# Altium PCB Newer.PcbDoc
Units mil, origin at the board's own origin, x right, y up, seen from the top; angles counter-clockwise.
Board outline 3350 x 2250 mil, 2 copper layers (Top Layer, Bottom Layer); 53 components, 48 nets, 213 pads, 30 vias.
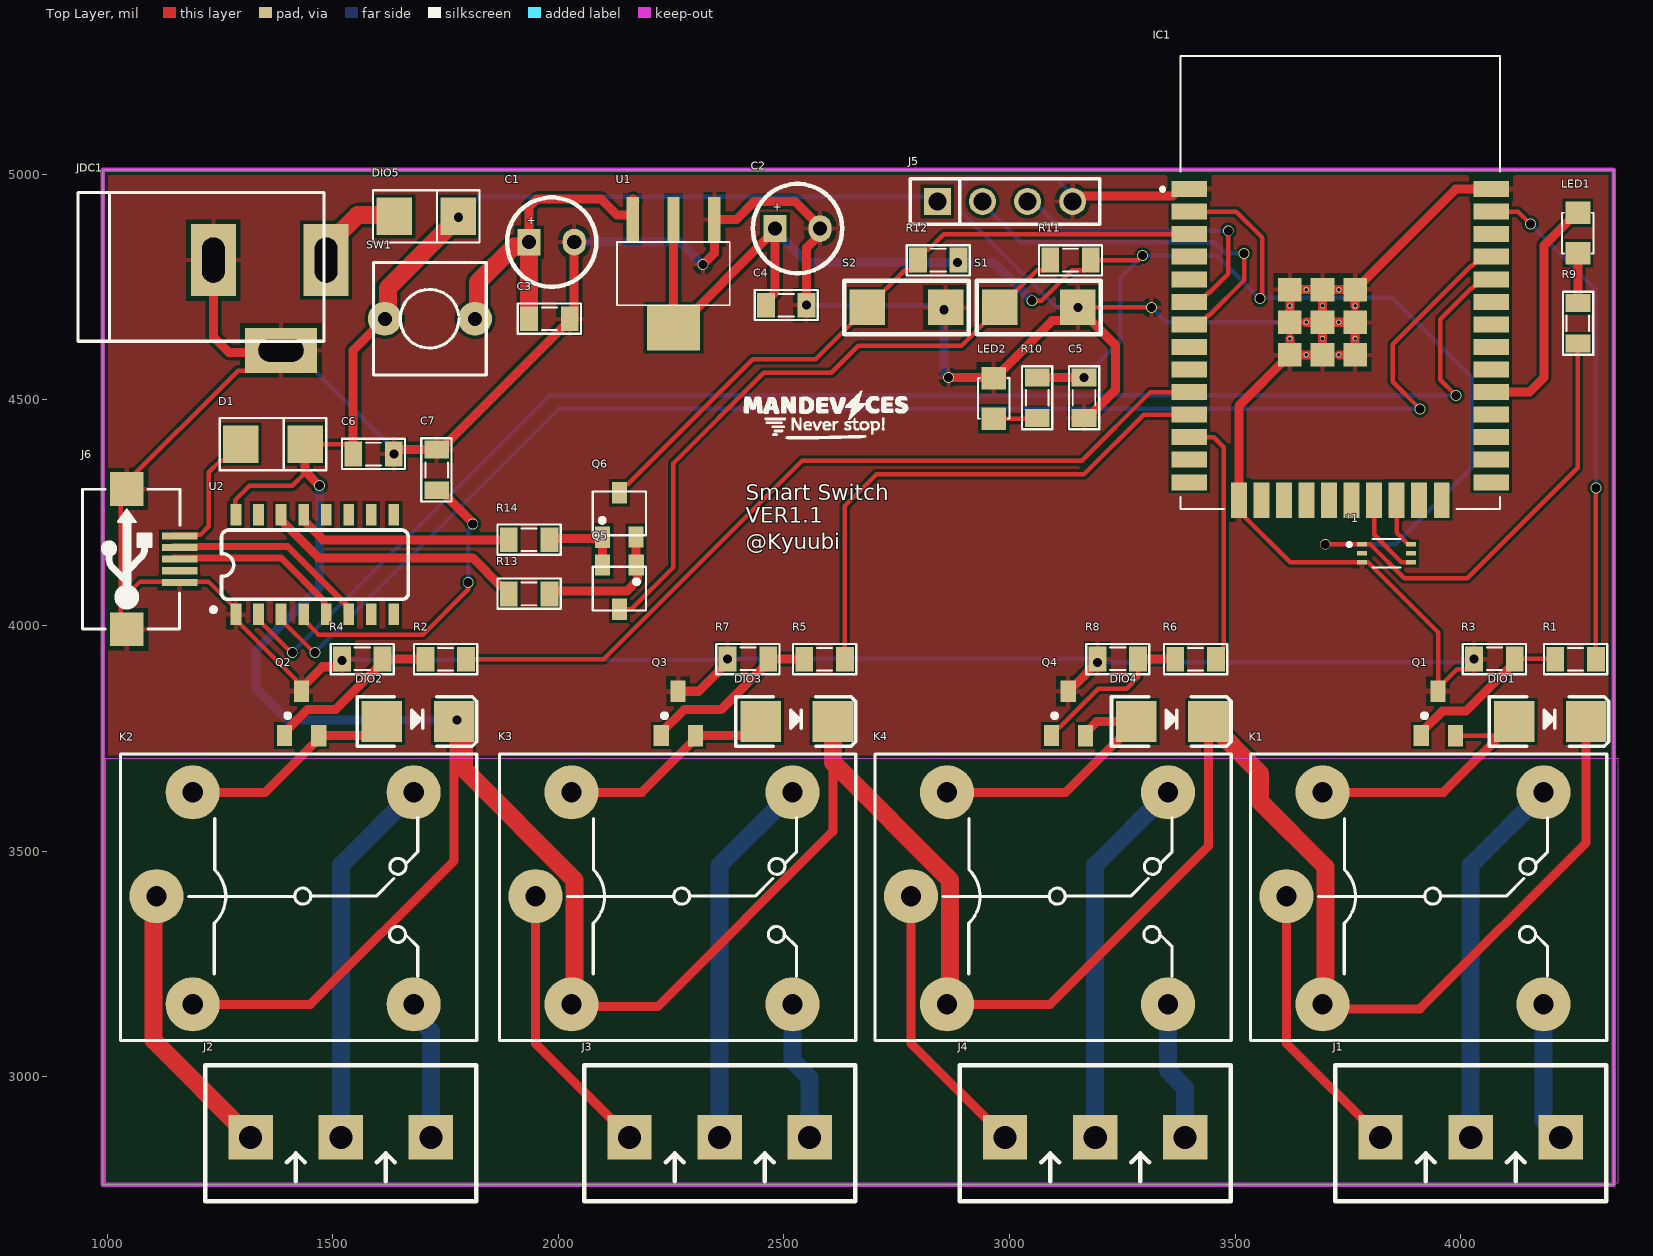
[diagram p0: Top Layer view]
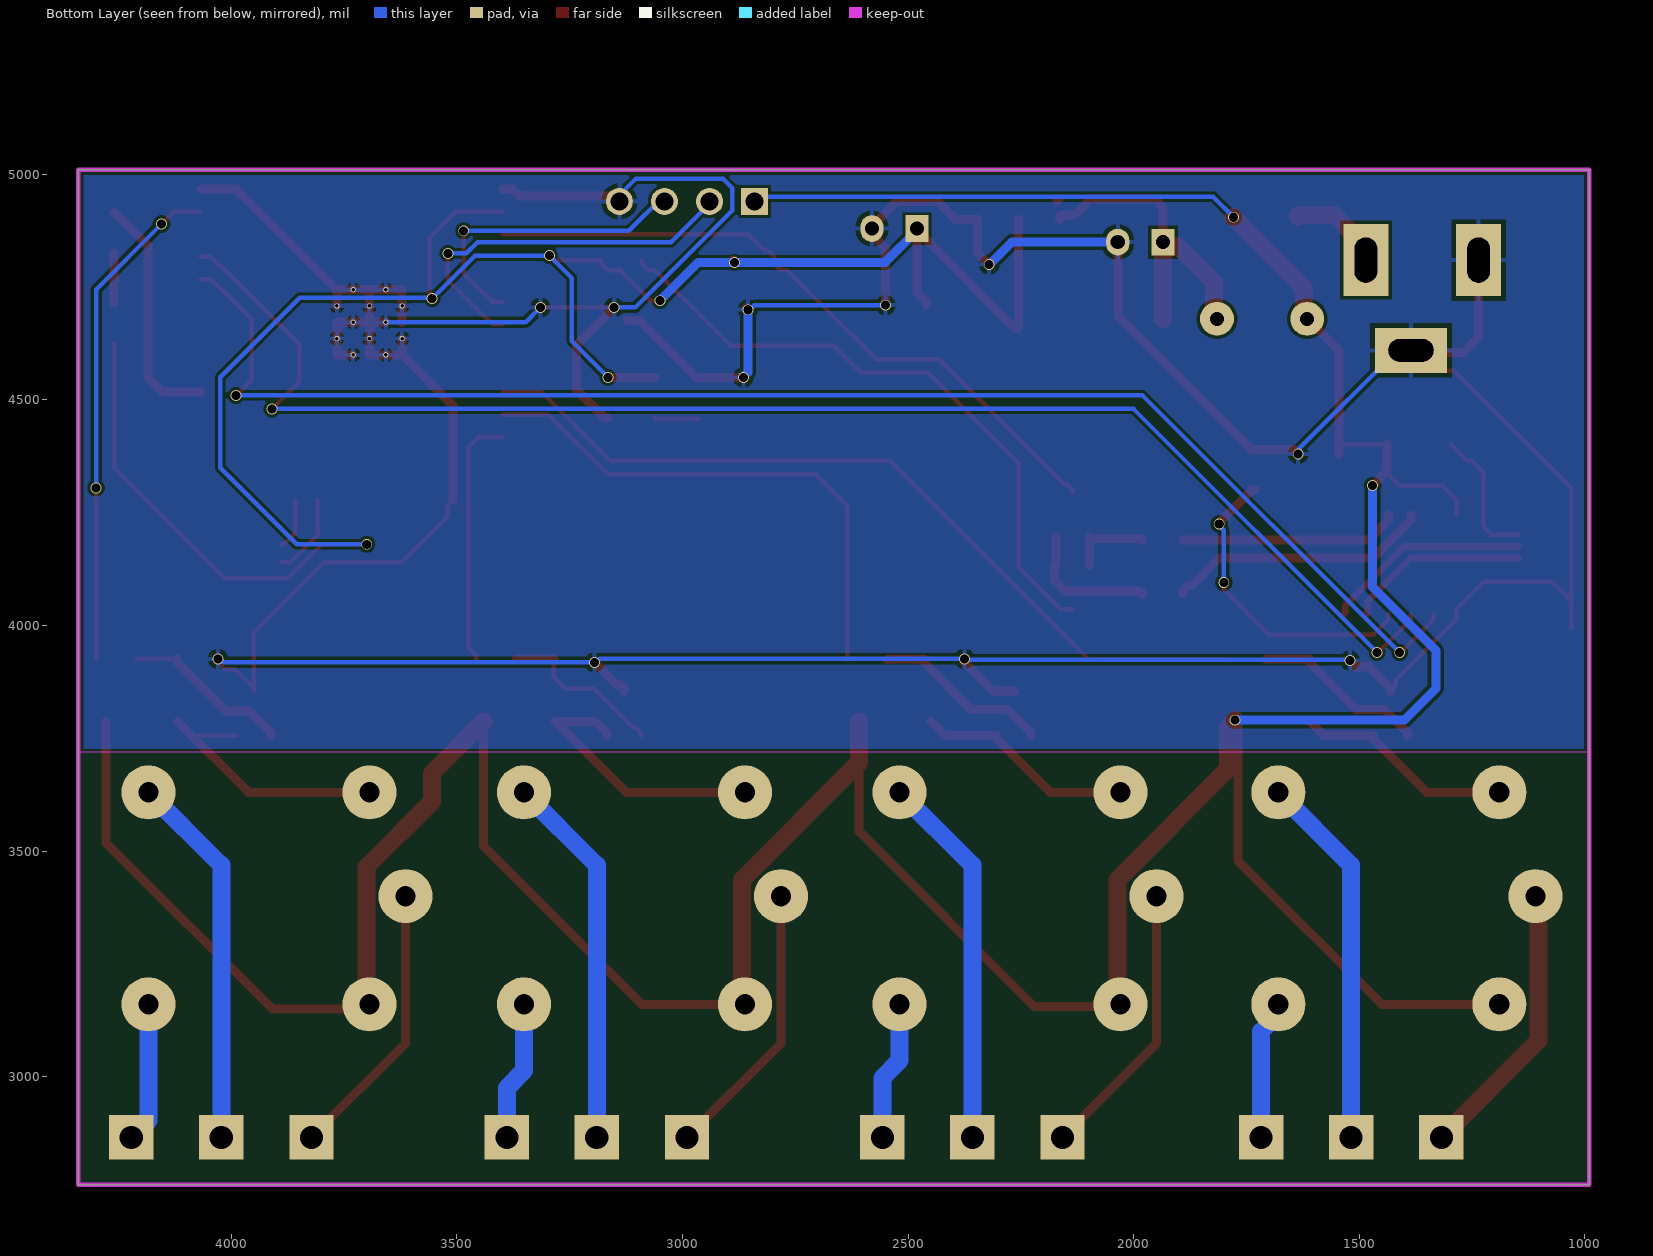
[diagram p1: Bottom Layer view, seen from below]
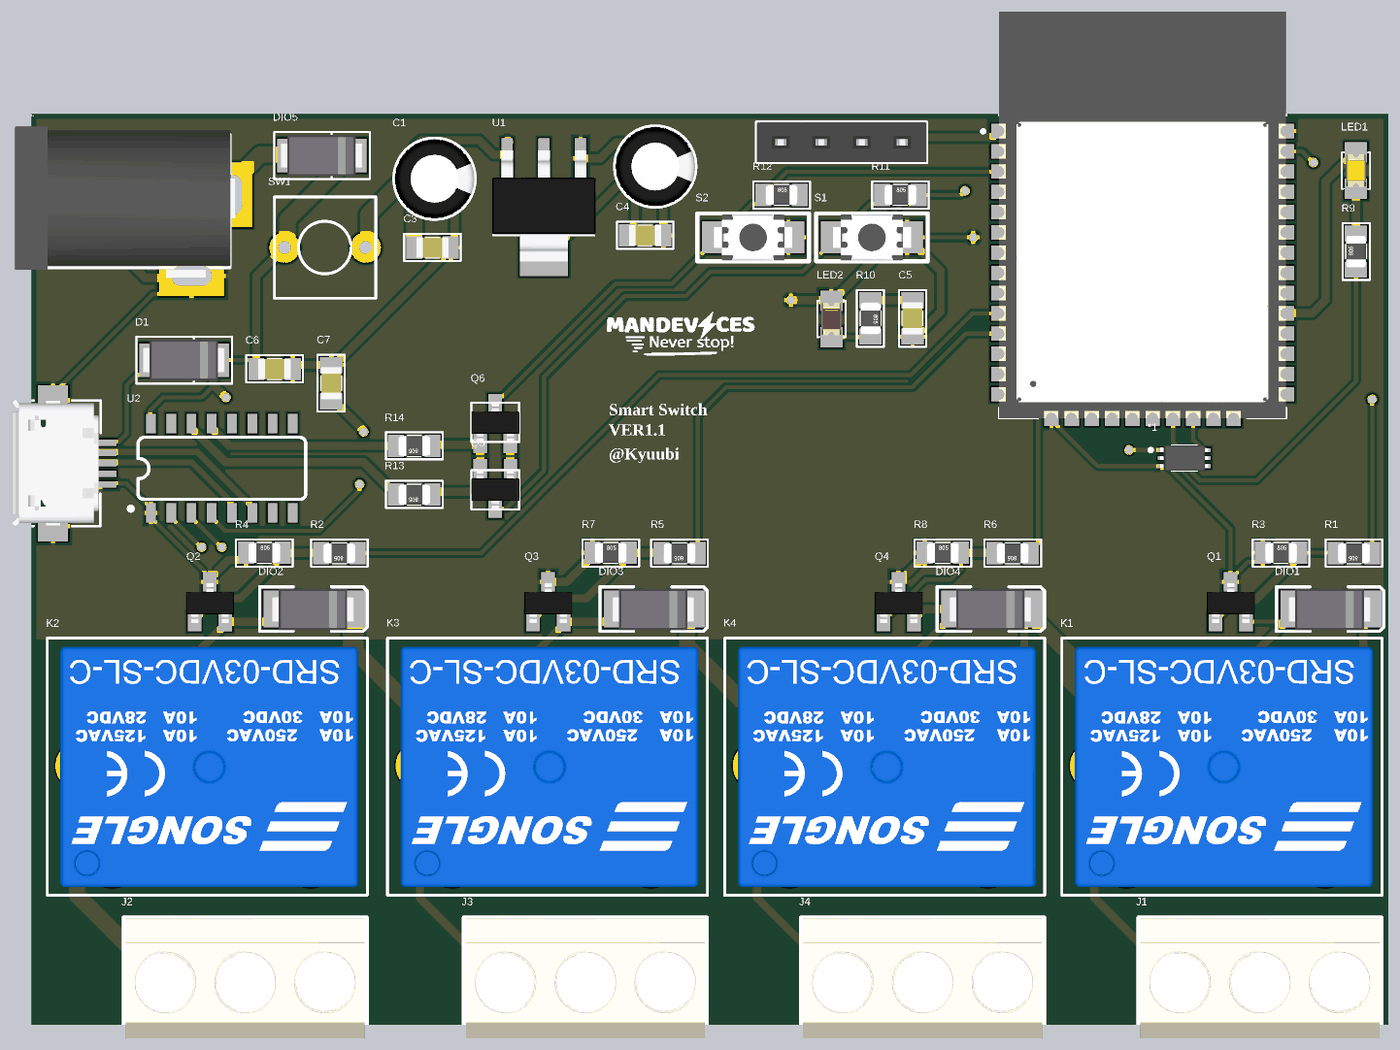
[diagram p2: 3D render of the assembled board from above, using the file's embedded part models]

## Layer stack, top to bottom
Top Solder: solder mask 0.4, Solder Resist, Dk 3.5
Top Layer: signal copper 1.4
Dielectric 1: dielectric 12.6, FR-4, Dk 4.8
Bottom Layer: signal copper 1.4
Bottom Solder: solder mask 0.4, Solder Resist, Dk 3.5

## Board outline
990,2760 990,5010 4340,5010 4340,2760

## Design rules (kind name [scope] priority, off if disabled: settings)
Clearance [All] p1: gap=7 ignorepadtopadclearanceinfootprint=TRUE
DiffPairsRouting [All] p1: maxlimit=10 minlimit=10 mostfreqgap=10 toplayer_minwidth=15 toplayer_maxwidth=15 toplayer_prefwidth=15 bottomlayer_minwidth=15 bottomlayer_maxwidth=15 bottomlayer_prefwidth=15 maxuncoupledlength=500
PolygonConnect [All] p1: connectstyle=Relief reliefconductorwidth=10 reliefentries=4 polygonreliefangle="90 Angle" airgapwidth=10
RoutingVias [All] p1: holewidth=20 width=24 viastyle="Through Hole" minholewidth=20 minwidth=24 maxholewidth=24 maxwidth=28
SolderMaskExpansion [All] p1: expansion=4 istentingtop=FALSE
Width [All] p1: maxlimit=40 minlimit=10 preferedwidth=20
29 further rules are at their usual default settings.

## Classes and differential pairs
component class U_MCU: *1 C1 C3 C4 C6 C7 D1 DIO5 IC1 IC2 J5 J6 JDC1 LED1 LED2 Q5 Q6 R9 R10 R11 R12 R13 R14 S1 S2 SW1 U1 U2
component class U_Control: DIO1 DIO2 DIO3 DIO4 J1 J2 J3 J4 K1 K2 K3 K4 Q1 Q2 Q3 Q4 R1 R2 R3 R4 R5 R6 R7 R8
differential pair D0: +D0_P -D0_N

## Components (designator, comment, footprint, x,y, rotation, side; value= is the part's Value field where it differs from the comment)
*1 "bh1750" BH1750 3865.62,4059 r90 top
C1 "220uF/10V" C5mm 1985,4850 r0 top
C2 "220uF/10V" C5mm 2530,4880 r0 top
C3 "220nF" CAP_0805 1980,4680 r180 top value=33p
C4 "100nF" CAP_0805 2505,4710 r180 top value=33p
C5 "10uF" CAP_0805 3165,4505 r90 top value=33p
C6 "10uF" CAP_0805 1590,4380 r180 top value=33p
C7 "100nF" CAP_0805 1730,4345 r270 top value=33p
D1 "Diode SMD" DIO-214AC(SMA) 1370,4400 r180 top value=1N5007
DIO1 "1N4148" DIO-SMD-106 4198.56,3787.1 r180 top value=1N5007
DIO2 "1N4148" DIO-SMD-106 1688.56,3787.1 r180 top value=1N5007
DIO3 "1N4148" DIO-SMD-106 2528.56,3787.1 r180 top value=1N5007
DIO4 "1N4148" DIO-SMD-106 3361.06,3787.1 r180 top value=1N5007
DIO5 "Diode SMD" DIO-214AC(SMA) 1710,4905 r180 top value=1N5007
IC1 "ESP32-WROOM-32" MODULE_ESP32-WROOM-32 3733.25,4760.43 r0 top
J1 "KF3" KF3-5.08 3822.5,2865 r0 top
J2 "KF3" KF3-5.08 1317.5,2865 r0 top
J3 "KF3" KF3-5.08 2157.5,2865 r0 top
J4 "KF3" KF3-5.08 2990,2865 r0 top
J5 "JP4" JP4-C1T 2840,4940 r0 top
J6 "USB-5" USB-M1 1160,4147 r90 top
JDC1 "Jac DC" DC-IN 1360,4710 r0 top
K1 "Relay-SPDT" RELAY5PIN-10A 3614,3400 r0 top
K2 "Relay-SPDT" RELAY5PIN-10A 1109,3400 r0 top
K3 "Relay-SPDT" RELAY5PIN-10A 1949,3400 r0 top
K4 "Relay-SPDT" RELAY5PIN-10A 2781.5,3400 r0 top
LED1 "LED" LED-0805-Orange 4260,4825 r90 top value="LED 3 ly Single Colour"
LED2 "LED" LED-0805-Red 2965,4458.5 r90 top value="LED 3 ly Single Colour"
Q1 "2SC1815" SOT23 3949.8,3805 r0 top value=C1815
Q2 "2SC1815" SOT23 1429.8,3805 r0 top value=C1815
Q3 "2SC1815" SOT23 2265,3805 r0 top value=C1815
Q4 "2SC1815" SOT23 3130,3805 r0 top value=C1815
Q5 "2SC1815" SOT23D 2135,4085 r180 top value=C1815
Q6 "2SC1815" SOT23D 2135,4245 r0 top value=C1815
R1 "330R" RES-SMD-0805 4255,3925 r180 top
R2 "330R" RES-SMD-0805 1750,3925 r180 top
R3 "100k" RES-SMD-0805 4075,3926 r0 top
R4 "100k" RES-SMD-0805 1565,3926 r0 top
R5 "330R" RES-SMD-0805 2590,3925 r180 top
R6 "330R" RES-SMD-0805 3412.5,3925 r180 top
R7 "100k" RES-SMD-0805 2420,3926 r0 top
R8 "100k" RES-SMD-0805 3240,3926 r0 top
R9 "10k" RES-SMD-0805 4260,4670 r90 top
R10 "1k" RES-SMD-0805 3061.5,4505 r270 top
R11 "10k" RES-SMD-0805 3135.3,4810 r0 top
R12 "10k" RES-SMD-0805 2841.91,4810 r0 top
R13 "10k" RES-SMD-0805 1935,4070 r180 top
R14 "10k" RES-SMD-0805 1935,4190 r180 top
S1 "SW-SMD" "SW 3x2x4" 3065,4705 r0 top
S2 "SW-SMD" "SW 3x2x4" 2771.61,4705 r0 top
SW1 "SW" SW2 1615,4680 r0 top value="SW chip 2 pin"
U1 "LM1117-ADJ" LM1117-SOP 2255,4850 r180 top
U2 "CH340C" SOP-16 1460,4135 r0 top

## Footprints (in the part's own frame and the unit in brackets; to place one, negate y for a bottom-side part, rotate by r counter-clockwise, add the part's x,y. Pads: shape width x height; smd on the part's side, far side on the other; paste and mask are expansions set on the pad)
BH1750 [mm]
  rect 0.25x0.55 smd: 1(3.065,2.131) 2(2.565,2.131) 3(2.065,2.131) 4(2.065,-0.619) 5(2.565,-0.619) 6(3.065,-0.619)
  silkscreen extent 1.77,-0.02 3.37,2.96, body extent 1.77,-0.74 3.37,2.26, height 0.75
C5mm [mm]
  rect 1.3x1.5 hole 0.8: 1(-1.27,0)
  oval 1.3x1.5 hole 0.8: 2(1.27,0)
  silkscreen extent -2.51,-2.51 2.51,2.51, body extent -2.5,-2.5 2.49,2.5, height 11.01
CAP_0805 [mil]
  rect 39.37x55 smd: 1(-45,0) 2(45,0)
  silkscreen extent -70,-34 70,33, body extent -40,-25 40,25, height 24
DC-IN [mil] "Jac DC input"
  rect 100x160 hole 50 slot 100 at 90 deg: 1(125,100) 2(-125,100)
  rect 160x100 hole 50 slot 100 at 0 deg: 3(25,-100)
  silkscreen extent -425,-80 120,250, body extent -410,-105 134,269, height 434
DIO-214AC(SMA) [mm] "DO-214AC Diode Smallest Size"
  rect 2x2.1 smd: 1(1.88,-0.051) 2(-1.732,-0.051)
  silkscreen extent -2.92,-1.52 3.07,1.42, body extent -2.5,-1.35 2.7,1.25, height 2.4
DIO-SMD-106 [mil]
  rect 90x90.55 smd: 1(80,0) 2(-80,0)
  silkscreen extent -130,-55 135,55, body extent -99,-50 106,52, height 95
JP4-C1T [mm] "4 row, straight, gold plating"
  rect 1.52x1.52 hole 1.02: 1(0,0)
  round 1.52 hole 1.02: 2(2.54,0) 3(5.08,0) 4(7.62,0)
  silkscreen extent -1.52,-1.27 9.14,1.27, body extent -1.52,-1.25 9.14,1.25, height 8.51
KF3-5.08 [mm]
  rect 2.5x2.5 hole 1.3: 1(0,0) 2(5.08,0) 3(10.147,0)
  silkscreen extent -2.54,-3.58 12.7,4.06, body extent -2.42,-3.51 12.58,3.99, height 10
LED-0805-Orange [mil]
  rect 50x55 smd: 1(0,0) 2(90,0)
  silkscreen extent 0,-35 90,35, body extent 5,-25 85,25, height 43
LED-0805-Red [mil]
  rect 50x55 smd: 1(0,0) 2(90,0)
  silkscreen extent 0,-35 90,35, body extent 5,-25 85,25, height 43
LM1117-SOP [mm]
  rect 0.7x2.54 smd: 1(-2.3,-1.27) 2(0,-1.27) 3(2.3,-1.27)
  rect 3x2.54 smd: 2(0,4.826)
  silkscreen extent -3.18,0 3.17,3.56, body extent -3.25,-1.78 3.25,5.18, height 1.68
MODULE_ESP32-WROOM-32 [mm]
  rect 2x0.9 smd: 1(-8.5,5.26) 2(-8.5,3.99) 3(-8.5,2.72) 4(-8.5,1.45) 5(-8.5,0.18) 6(-8.5,-1.09) 7(-8.5,-2.36) 8(-8.5,-3.63) 9(-8.5,-4.9) 10(-8.5,-6.17) 11(-8.5,-7.44) 12(-8.5,-8.71) 13(-8.5,-9.98) 14(-8.5,-11.25) 25(8.5,-11.25) 26(8.5,-9.98) 27(8.5,-8.71) 28(8.5,-7.44) 29(8.5,-6.17) 30(8.5,-4.9) 31(8.5,-3.63) 32(8.5,-2.36) 33(8.5,-1.09) 34(8.5,0.18) 35(8.5,1.45) 36(8.5,2.72) 37(8.5,3.99) 38(8.5,5.26)
  rect 0.9x2 smd: 15(-5.715,-12.25) 16(-4.445,-12.25) 17(-3.175,-12.25) 18(-1.905,-12.25) 19(-0.635,-12.25) 20(0.635,-12.25) 21(1.905,-12.25) 22(3.175,-12.25) 23(4.445,-12.25) 24(5.715,-12.25)
  rect 1.33x1.33 smd: 39_1(-2.835,-0.405) 39_2(-1,-0.405) 39_3(0.835,-0.405) 39_4(-2.835,-2.24) 39_5(-1,-2.24) 39_6(0.835,-2.24) 39_7(-2.835,-4.075) 39_8(-1,-4.075) 39_9(0.835,-4.075)
  round 0.3 hole 0.2: 39_10(-1.917,-0.405) 39_11(-0.082,-0.405) 39_12(-2.835,-1.322) 39_13(-1,-1.322) 39_14(0.835,-1.322) 39_15(-1.917,-2.24) 39_16(-0.082,-2.24) 39_17(-2.835,-3.157) 39_18(-1,-3.157) 39_19(0.835,-3.157) 39_20(-1.917,-4.075) 39_21(-0.082,-4.075)
  silkscreen extent -10.1,-12.75 9,12.75, body extent -9.02,-12.75 8.98,12.75, height 3.2
RELAY5PIN-10A [mil]
  round 120 hole 45: 1(0,0) 2(570,230) 3(570,-240) 4(80,-240) 5(80,230)
  silkscreen extent -80,-320 710,315, body extent -48,-300 688,294, height 102
RES-SMD-0805 [mil]
  rect 39.37x55 smd: 1(-45,0) 2(45,0)
  silkscreen extent -70,-34 70,33, body extent -39,-25 39,25, height 31
SOP-16 [mm]
  rect 0.6x1.2 smd: 1(-4.445,-2.8) 2(-3.175,-2.8) 3(-1.905,-2.8) 4(-0.635,-2.8) 5(0.635,-2.8) 6(1.905,-2.8) 7(3.175,-2.8) 8(4.445,-2.8) 9(4.445,2.8) 10(3.175,2.8) 11(1.905,2.8) 12(0.635,2.8) 13(-0.635,2.8) 14(-1.905,2.8) 15(-3.175,2.8) 16(-4.445,2.8)
  silkscreen extent -5.84,-2.67 5.26,1.95, body extent -4.95,-3.47 4.95,3.47, height 1.75
SOT23 [mm] "SOT 23 _ 1-3-2"
  rect 0.85x1.2 smd: 1(-0.94,-1.245) 2(0.985,-1.25) 3(0.005,1.25)
  silkscreen extent -0.88,-0.25 -0.64,0, body extent -1.47,-1.33 1.53,1.17, height 1.06
SOT23D [mm] "SOT 23C - 1-3-2 - BCE"
  rect 0.85x1.2 smd: 1(-0.95,-1.25) 2(0.94,-1.245) 3(0,1.25)
  silkscreen extent -1.5,-1.14 1.5,1.32, body extent -1.5,-1.17 1.5,1.33, height 1.06
SW2 [mil] "SW button 2pin, 250x 250 mil"
  round 75 hole 31: 1(0,0) 2(200,0)
  silkscreen extent -25,-125 225,125
"SW 3x2x4" [mm]
  rect 2x2 smd: 1(-2.2,0) 2(2.2,0)
  silkscreen extent -3.5,-1.5 3.5,1.5, body extent -2.45,-1.45 2.45,1.45, height 2
USB-M1 [mm]
  rect 0.4x2 smd: 1(1.3,0) 2(0.65,0) 3(0,0) 4(-0.65,0) 5(-1.321,0)
  rect 1.9x1.9 smd: 5(-3.95,2.968) 5(3.95,2.968)
  silkscreen extent -3.94,-0.03 3.94,5.46, body extent -3.98,0.11 4,5.54, height 2.71

## Part data
C1 C2: library part "Cap Pol", "Polarized Capacitor (Axial)", LatestRevisionDate=17-Jul-2002, LatestRevisionNote="Re-released for DXP Platform.", PackageReference=POLAR0.8, Published=8-Jun-2000, Publisher="Altium Limited"
C3 C4 C5 C6 C7: library part CapSMD, "Capacitor", LatestRevisionDate=17-Jul-2002, LatestRevisionNote="Re-released for DXP Platform.", PackageReference=RAD-0.3, Published=8-Jun-2000, Publisher="Altium Limited"
D1 DIO5: "Default Diode", Code - JEDEC=DO-214-AB, Published=8-Jun-2000, Publisher="Altium Limited", Revision="July-2002: Re-released for DXP Platform."
DIO1 DIO2 DIO3 DIO4: library part "Diode SMD", "Default Diode", Code - JEDEC=DO-214-AB, Published=8-Jun-2000, Publisher="Altium Limited", Revision="July-2002: Re-released for DXP Platform."
IC1: "Bluetooth, WiFi Transceiver Module 2.4GHz ~ 2.5GHz Surface Mount", Package="Module Espressif Systems", Digi-Key_Part_Number=1904-1010-1-ND, Digi-Key_Purchase_URL=https://www.digikey.com/product-detail/en/espressif-systems/ESP32-WROOM-32/1904-1010-1-ND/8544305?utm_source=snapeda&utm_medium=aggregator&utm_campaign=symbol, MF="Espressif Systems", MP=ESP32-WROOM-32, SnapEDA_Link=https://www.snapeda.com/parts/ESP32-WROOM-32/Espressif%20Systems/view-part/2753322/?ref=snap
J1 J2 J3 J4: Manufacturer="Würth Elektronik eiSos GmbH", partNo=691103110003, ComponentLink1 Description=Manufacturer, ComponentLink1URL=http://www.we-online.com, ComponentLink2 Description=Datasheet, ComponentLink2URL=http://katalog.we-online.de/em/datasheet/6911031100xx.pdf, Created by="Karrer Zheng", Created Date="29 October 2013", NoPins=3
J5: "WR-PHD 2.54 mm Angled Socket Header", Manufacturer="W¨¹rth Elektronik eiSos GmbH", partNo=613004143121, ComponentLink1 Description=Manufacturer, ComponentLink1URL=http://www.we-online.com, ComponentLink2 Description=Datasheet, ComponentLink2URL=http://katalog.we-online.de/em/datasheet/6130xx143121.pdf, Created by="Karrer Zheng", Created Date="29 March 2013", NoPins=04
J6: Manufacturer=FCI, Manufacturer Part Number=10118193-0001LF, Supplier Part Number 1=609-4616-1-ND, .Checked PCB=RF, .Checked SCH=MM, .Creator=MM, Category="Connectors, Interconnects", ComponentLink1Description=http://portal.fciconnect.com/Comergent//fci/drawing/10118193.pdf, ComponentLink1URL=http://portal.fciconnect.com/Comergent//fci/drawing/10118193.pdf, Connector Type="USB - micro B", Features="Shielded, Solder Retention", Gender=Receptacle, Ingress Protection=-, Mounting Type="Surface Mount, Right Angle, Horizontal", Number of Contacts=5, Packaging="Cut Tape (CT)", Pricing 1="1=0.46, 10=0.433, 25=0.3712, 50=0.3156, 100=0.3032, 250=0.27224, 500=0.25988 (USD)", RoHS="RoHS Compliant", Specifications="USB 2.0", Stock 1=28642, Supplier 1=Digi-Key
JDC1: library part DCIN, "Jac DC input"
K1 K2 K3 K4: "Single-Pole Dual-Throw Relay", LatestRevisionDate=17-Jul-2002, LatestRevisionNote="Re-released for DXP Platform.", PackageReference=MODULE5B, Published=24-Mar-1999, Publisher="Altium Limited"
LED1 LED2: "LED Single colour Green and Red"
Q1 Q2 Q3 Q4: "NPN 600mW, ECB"
Q5 Q6: library part C1815, "NPN 600mW, ECB"
R1 R2 R3 R4 R5 R6 R7 R8: library part "Resistor - SMD", "Resistor", Manufacturer="Generic Components", Class=Passive, Published=08/06/2000, Publisher="Altium Hobart Technology Centre"
R9 R10 R11 R12 R13 R14: library part "Resistor - SMD", "Resistor SMD", Manufacturer="Generic Components", Class=Passive, Published=08/06/2000, Publisher="Altium Hobart Technology Centre"
S1 S2: "Switch", LatestRevisionDate=17-Jul-2002, LatestRevisionNote="Re-released for DXP Platform.", PackageReference=SPST-2, Published=24-Mar-1999, Publisher="Altium Limited"
SW1: library part SW2, "Switch button 2 pin"
U1: "800mA Low-Dropout Linear Regulator", Creator="Nguyen Ba Bien", Website=http://group3i.net
U2: "USB to serial chip CH340", Package=Package, Availability=Unavailable, Check_prices=https://www.snapeda.com/parts/CH340C/WCH/view-part/5428851/?ref=eda, MF=WCH, MP=CH340C, Price=None, SnapEDA_Link=https://www.snapeda.com/parts/CH340C/WCH/view-part/5428851/?ref=snap

## Via types
v1: diameter 24, hole 20, Top Layer to Bottom Layer, 30 vias

## Nets (pads, with @x,y where several pads share a name; then routed paths per layer and width w, separated by ;. In a path a pad name is that pad's centre, name@x,y a point inside that pad or via, vN(x,y) a via of type N, cw(c..) or ccw(c..) an arc to the next point about the centre after c; other vN are vias at no path point)
3V3: *1.1 C2.1 C4.2 C5.2 IC1.2 R9.1 R10.1 R11.2 R12.2 U1.2 | length 4827.7
  Top Layer w10: v1(3050,4720) 3070.9,4720 3138.4,4787.5 3165.61,4787.5 3180.29,4802.19 R11.2 3285,4810 v1(3295,4820) ; IC1.2 3502.48,4917.52 3560,4860 3560,4730 v1(3555,4725) ; v1(3700,4180) 3700.24,4179.76 3781.65,4179.76 *1.1 3800.32,4179.69 3875,4105 4015,4105 4260,4350 R9.1
  Top Layer w20: U1.2@2255,4900 2255,4660 2264.06,4660 2464.41,4860.35 2464.41,4864.41 C2.1 2480,4737.81 2460,4717.81 C4.2 ; v1(2885,4805) 2886.91,4806.91 R12.2 ; R10.1 v1(3165,4550)
  Bottom Layer w10: v1(3165,4550) 3245,4630 3245,4770 v1(3295,4820) 3460,4820 v1(3555,4725) 3556.27,4726.27 3848.73,4726.27 4025,4550 4025,4350 3855,4180 v1(3700,4180)
  Bottom Layer w20: C2.1 2480,4876.06 2551.06,4805 v1(2885,4805) 2965,4805 v1(3050,4720)
5V: C6.2 D1.2 DIO1.2 DIO2.2 DIO3.2 DIO4.2 DIO5.2 J5.1 K1.4 K2.4 K3.4 K4.4 SW1.1 U2.16 | length 9265.5
  Top Layer w10: U2.16 1283,4247.24 1283,4278 1315,4310 1410,4310 1438.2,4338.2 1438.2,4341.8 ; D1.2 1530.32,4402 C6.2@1545,4387.31
  Top Layer w20: K2.4 1450,3160 1768.56,3478.56 DIO2.2 ; D1.2 1438.2,4341.8 v1(1470,4310) ; C6.2 1545,4387.31 1545,4610 SW1.1 ; K3.4 2034,3155 2220,3155 2608.56,3543.56 2608.56,3695.97 ; K4.4 3090,3160 3441.06,3511.06 DIO4.2@3441.06,3786.83 ; K1.4 3704,3150 3910,3150 4278.56,3518.56 DIO1.2
  Top Layer w40: SW1.1 1621.7,4686.7 1621.7,4748.52 v1(1778.2,4905.03) ; v1(1775,3790) 1790.21,3774.79 1790.21,3681.83 2036,3436.04 2036,3167 K3.4 ; DIO3.2 2608.56,3695.97 2868.5,3436.04 2868.5,3167 K4.4 ; DIO4.2 3441.06,3786.83 3555.53,3672.36 3555.53,3609.47 3701,3464 3701,3167 K1.4
  Bottom Layer w10: v1(1778.2,4905.03) 1823.17,4950 J5.1@2844.01,4950
  Bottom Layer w20: v1(1470,4310) 1470,4085 1330,3945 1330,3860 1400,3790 v1(1775,3790)
C0: J1.1 K1.1 | length 621.4
  Top Layer w20: K1.1 3614,3073.5 J1.1
C1: J2.1 K2.1 | length 627.2
  Top Layer w40: K2.1 1102,3393 1102,3080.5 J2.1
C2: J3.1 K3.1 | length 621.4
  Top Layer w20: K3.1 1949,3073.5 J3.1
C3: J4.1 K4.1 | length 621.4
  Top Layer w20: K4.1 2781.5,3073.5 J4.1
D0_N: J6.2 U2.6 | length 459.3
  Top Layer w15: J6.2@1146.84,4175.08 1399.92,4175.08 1530.69,4044.31 1530.69,4029.07 U2.6
D0_P: J6.3 U2.5 | length 404.6
  Top Layer w15: J6.3@1146.84,4149.49 1385.51,4149.49 1480.69,4054.31 1480.69,4029.07 U2.5
GND: *1.3 C1.2 C2.2 C3.1 C4.1 C5.1 C6.1 C7.1 IC1.1 IC1.15 IC1.38 IC1.39_1 IC1.39_2 IC1.39_3 IC1.39_4 IC1.39_5 IC1.39_6 IC1.39_7 IC1.39_8 IC1.39_9 IC1.39_10 IC1.39_11 IC1.39_12 IC1.39_13 IC1.39_14 IC1.39_15 IC1.39_16 IC1.39_17 IC1.39_18 IC1.39_19 IC1.39_20 IC1.39_21 J5.4 J6.5 JDC1.2 JDC1.3 LED2.2 Q1.3 Q2.3 Q3.3 Q4.3 R3.1 R4.1 R7.1 R8.1 S1.2 S2.2 U1.1 U2.1 | length 11278.3
  Top Layer w10: J6.5@1030,3993.98 1030,4055 ; JDC1.3 1380,4605 1340,4565 1290,4565 1030,4305 1030,4055 ; Q2.3 1418.27,3865.95 1418.27,3879.68 1285,4012.95 U2.1 1285,4036.57 1224.09,4097.49 1146.84,4097.49 1072.49,4097.49 1030,4055 ; v1(1520,3922.09) R4.1 ; v1(3151.61,4705) v1(3315,4705) ; IC1.15 3520.96,4265.43 3520.96,4241.38 3622.03,4140.31 3794.68,4140.31 3950,3985 Q1.3@3950,3861.1 ; Q1.3 Q1.3@3950,3861.1 ; R3.1@4030,3918.19 4015.31,3903.5 3992.4,3903.5 Q1.3@3950,3861.1
  Top Layer w20: JDC1.2 1235,4640 1270,4605 JDC1.3@1380,4605 ; Q2.3 1430,3861.1 1477.4,3908.5 R4.1@1510.31,3908.5 ; C6.1@1644.69,4390 C7.1 1737.81,4390 2035,4687.19 C1.2 ; Q3.3 2311.03,3854.21 R7.1@2375,3918.19 ; v1(2320,4800) 2345.55,4825.55 U1.1 2394.67,4900 2434.67,4940 2523.94,4940 2580,4883.94 C2.2 2580,4867.63 2550,4837.63 v1(2550,4710) ; v1(2855,4700) 2855,4701.77 S2.2 ; v1(2865,4550) 2963.5,4550 LED2.2 2967.5,4548.5 3094.63,4675.63 S1.2@3122.24,4675.63 ; Q4.3 3130.2,3861.1 3136.93,3867.84 3144.65,3867.84 v1(3195,3918.19) ; J5.4@3144.01,4950 3146.24,4952.24 3361.67,4952.24 3376.95,4967.52 IC1.1 ; v1(3151.61,4705) 3235,4621.61 3235,4522.18 3172.81,4460 C5.1 ; IC1.15 3508.25,4486.61 IC1.39_7 ; IC1.39_17 IC1.39_7 ; IC1.39_4 IC1.39_12 IC1.39_1 IC1.39_10 IC1.39_2 ; IC1.39_15 IC1.39_5 ; IC1.39_21 IC1.39_9 IC1.39_19 IC1.39_6 IC1.39_16 IC1.39_5 ; IC1.39_14 IC1.39_3 ; IC1.38 3989.15,4967.52 IC1.39_3 ; IC1.39_7 IC1.39_20 IC1.39_8 IC1.39_18 IC1.39_5 ; IC1.39_5 IC1.39_13 IC1.39_2 ; IC1.39_2 IC1.39_11 IC1.39_3
  Bottom Layer w10: JDC1.3 1415,4610 1632.32,4392.68 1632.32,4382.68 v1(1635,4380) ; v1(1520,3922.09) 1521.95,3924.05 2373.04,3924.05 v1(2375,3926) 3183.4,3926 3191.21,3918.19 v1(3195,3918.19) 4018.39,3918.19 4026.21,3926 v1(4030,3926) ; v1(2550,4710) 2841.21,4710 2851.21,4700 v1(2855,4700) ; J5.4@3144.01,4950 3104.01,4990 2910,4990 2890,4970 2890,4920 3105,4705 v1(3151.61,4705) ; v1(3315,4705) 3347.76,4672.24 IC1.39_15
  Bottom Layer w20: C1.2 2270,4850 v1(2320,4800) ; v1(2855,4700) 2855,4561.08 2865,4551.08 v1(2865,4550)
GPIO0: Q5.3 R11.1 S1.1 | length 1415.9
  Top Layer w10: Q5.3 2161.75,4035.79 2255,4129.04 2255,4360 2455,4560 2605,4560 2665,4620 2893.39,4620 S1.1 3060.89,4787.5 3075.61,4787.5 3090.29,4802.19 R11.1
IO5: IC1.29 LED1.2 | length 528.1
  Top Layer w20: IC1.29 4152.52,4517.52 4185,4550 4185,4842.5 4257.5,4915 LED1.2
NC0: J1.2 K1.2 | length 831.9
  Bottom Layer w40: J1.2 4022.5,3468.5 K1.2
NC1: J2.2 K2.2 | length 831.9
  Bottom Layer w40: J2.2 1517.5,3468.5 K2.2
NC2: J3.2 K3.2 | length 831.9
  Bottom Layer w40: J3.2 2357.5,3468.5 K3.2
NC3: J4.2 K4.2 | length 831.9
  Bottom Layer w40: J4.2 3190,3468.5 K4.2
Net*1_4: *1.4 IC1.21 | length 183.9
  Top Layer w10: IC1.21 3808.25,4201.24 3869.17,4140.31 *1.4
Net*1_6: *1.6 IC1.22 | length 115
  Top Layer w10: IC1.22 3858.25,4205.69 3884.25,4179.69 *1.6
NetC1_1: C1.1 C3.2 SW1.2 U1.3 | length 750
  Top Layer w20: C1.1 1935,4928.28 1951.72,4945 2095,4945 2130,4910 2160.67,4910 2164.45,4906.22 U1.3 ; U1.3@2164.45,4945 2165.67,4945 U1.3@2169.45,4941.22
  Top Layer w40: SW1.2 1821.7,4686.7 1821.7,4761.35 1900.82,4840.47 1929.41,4840.47 1935,4846.06 C1.1 C3.2
NetC7_2: C7.2 U2.4 | length 693.7
  Top Layer w10: U2.4 1435,4012.95 1467.95,3980 1700,3980 1800,4080 v1(1800,4095)
  Top Layer w20: C7.2 1737.81,4300 1810,4227.82 v1(1810,4225)
  Bottom Layer w10: v1(1800,4095) 1800,4211.21 1810,4221.21 v1(1810,4225)
NetD1_1: D1.1 J6.1 | length 304
  Top Layer w10: J6.1@1146.84,4200.67 1205.67,4200.67 1225,4220 1225,4340 1250.66,4365.66 1261.63,4365.66 1296,4400.03 D1.1
NetDIO1_1: DIO1.1 K1.5 Q1.2 | length 632.7
  Top Layer w10: Q1.2 4087.25,3755.79 DIO1.1
  Top Layer w20: K1.5 3961.74,3630 4118.56,3786.83 DIO1.1
NetDIO2_1: DIO2.1 K2.5 Q2.2 | length 488.7
  Top Layer w20: K2.5 1349.7,3630 1468.6,3748.9 Q2.2 1577.25,3755.79 DIO2.1
NetDIO3_1: DIO3.1 K3.5 Q3.2 | length 488.7
  Top Layer w20: K3.5 2184.9,3630 2303.8,3748.9 Q3.2 2417.25,3755.79 DIO3.1
NetDIO4_1: DIO4.1 K4.5 Q4.2 | length 614.1
  Top Layer w20: K4.5 3124.24,3630 3281.06,3786.83 DIO4.1 3193.22,3787.1 3168.8,3762.68 Q4.2
NetDIO5_1: DIO5.1 JDC1.1 | length 211.2
  Top Layer w40: JDC1.1 1485,4840 1555,4910 1633,4910 DIO5.1
NetIC1_10: IC1.10 R2.1 | length 1849
  Top Layer w10: R2.1 2100,3925 2540,4365 3160,4365 3312.52,4517.52 IC1.10
NetIC1_11: IC1.11 R5.1 | length 1187.5
  Top Layer w10: R5.1 2635,4265 2705,4335 3165,4335 3297.52,4467.52 IC1.11
NetIC1_12: IC1.12 R6.1 | length 563
  Top Layer w10: IC1.12 3452.48,4417.52 3475,4395 3475,3950.31 3457.5,3932.81 R6.1
NetIC1_37: IC1.37 R1.1 | length 1123.6
  Top Layer w10: IC1.37 4127.48,4917.52 v1(4155,4890) ; R1.1 v1(4300,4305)
  Bottom Layer w10: v1(4155,4890) 4300,4745 v1(4300,4305)
NetLED1_1: LED1.1 R9.2 | length 110
  Top Layer w20: R9.2 LED1.1
NetLED2_1: LED2.1 R10.2 | length 97.1
  Top Layer w10: LED2.1 3060,4458.5 R10.2
NetQ1_1: Q1.1 R1.2 R3.2 | length 376.6
  Top Layer w10: R3.2 4209,3926 R1.2
  Top Layer w20: Q1.1 3912.8,3762.89 3959.91,3810 4011.81,3810 4120,3918.19 R3.2
NetQ2_1: Q2.1 R2.2 R4.2 | length 391.6
  Top Layer w20: Q2.1 1392.8,3762.89 1443.5,3813.59 1505.4,3813.59 1610,3918.19 R4.2 1610.5,3925.5 1704.5,3925.5 R2.2
NetQ3_1: Q3.1 R5.2 R7.2 | length 396.4
  Top Layer w20: Q3.1 2228,3762.89 2278.7,3813.59 2360.4,3813.59 2465,3918.19 R7.2 2465.5,3925.5 2544.5,3925.5 R5.2
NetQ4_1: Q4.1 R6.2 R8.2 | length 373.4
  Top Layer w10: Q4.1 3093,3762.89 3104.73,3774.62 3111.62,3774.62 3197,3860 3260,3860 3285,3885 R8.2
  Top Layer w20: R8.2 3285.5,3925.5 3367,3925.5 R6.2
NetQ5_1: Q5.1 Q6.2 R13.1 | length 304.7
  Top Layer w20: R13.1 1986.41,4076.41 2151.41,4076.41 2175,4100 2175,4131.61 Q5.1 2172.2,4134.41 2172.2,4195.8 Q6.2
NetQ5_2: Q5.2 Q6.1 R14.1 | length 181.9
  Top Layer w20: R14.1 1982.9,4192.89 2094.7,4192.89 Q6.1 2097.8,4195.59 2097.8,4134.2 Q5.2
NetR13_2: R13.2 U2.14 | length 589.1
  Top Layer w20: U2.14 1385,4233.43 1468.43,4150 1810,4150 1872.5,4087.5 1880.32,4087.5 1890,4077.81 R13.2
NetR14_2: R14.2 U2.13 | length 484.8
  Top Layer w20: U2.13 1435,4233.43 1478.43,4190 R14.2
NO0: J1.3 K1.3 | length 310.7
  Bottom Layer w40: K1.3 4184,2903 J1.3
NO1: J2.3 K2.3 | length 310.7
  Bottom Layer w40: K2.3 1679,3138.35 1717,3100.35 J2.3
NO2: J3.3 K3.3 | length 310.7
  Bottom Layer w40: K3.3 2519,3035.28 2557,2997.28 J3.3
NO3: J4.3 K4.3 | length 310.7
  Bottom Layer w40: K4.3 3351.5,3013.02 3389.5,2975.02 J4.3
nRST: IC1.3 Q6.3 R12.1 S2.1 | length 1514.3
  Top Layer w10: Q6.3 2135,4301.1 2146.73,4312.84 2153.62,4312.84 2430.79,4590 2570,4590 S2.1 2767.5,4787.5 2782.22,4787.5 2796.91,4802.19 R12.1 2796.91,4817.81 2811.59,4832.5 2819.41,4832.5 2854.43,4867.52 IC1.3
RX0: IC1.34 U2.2 | length 3266
  Top Layer w10: U2.2 1335,4012.95 1407.95,3940 v1(1410,3940) ; v1(3990,4510) 3955,4545 3955,4678.68 4023.59,4747.28 4026,4747.28 4046.24,4767.52 IC1.34
  Bottom Layer w10: v1(1410,3940) 1980,4510 v1(3990,4510)
RXI: IC1.35 U2.3 | length 3257.4
  Top Layer w10: U2.3 1385,4012.95 1457.95,3940 v1(1460,3940) ; v1(3910,4480) 3850,4540 3850,4623.68 4023.59,4797.28 4026,4797.28 4046.24,4817.52 IC1.35
  Bottom Layer w10: v1(1460,3940) 2000,4480 v1(3910,4480)
SCL: IC1.6 J5.3 | length 679.4
  Top Layer w10: IC1.6 3420.26,4717.52 3440.5,4737.76 3442.9,4737.76 3485,4779.86 v1(3485,4875)
  Bottom Layer w10: J5.3@3044.01,4950 3119.01,4875 v1(3485,4875)
SDA: IC1.7 J5.2 | length 860.8
  Top Layer w10: IC1.7 3420.26,4667.52 3440.5,4687.76 3442.9,4687.76 3520,4764.86 v1(3520,4825)
  Bottom Layer w10: J5.2@2944.01,4950 2953.55,4940.46 2953.55,4921.45 3025,4850 3454.04,4850 3479.04,4825 v1(3520,4825)
pads on no net: *1.2 *1.5 IC1.4 IC1.5 IC1.8 IC1.9 IC1.13 IC1.14 IC1.16 IC1.17 IC1.18 IC1.19 IC1.20 IC1.23 IC1.24 IC1.25 IC1.26 IC1.27 IC1.28 IC1.30 IC1.31 IC1.32 IC1.33 IC1.36 J6.4 U2.7 U2.8 U2.9 U2.10 U2.11 U2.12 U2.15

## Polygon pours and split planes (outlines as drawn)
GND on Top Layer "Kyuubi" (solid, remove dead copper, pour order 0): 990,2760 4340,2760 4340,5000 4335,5005 990,5005 990,2770 985,2765
GND on Bottom Layer "Kyuubi" (solid, remove dead copper, pour order 1): 995,5010 990,5005 990,2760 4340,2760 4330,2770 4330,5010 1000,5010 995,5015

## Keep-outs
Top Layer:
  rectangle: 995,2765 4350,3705
Bottom Layer:
  rectangle: 990,2760 4340,3720
Keep-Out Layer:
  the board outline again, w10

## Silkscreen, mask and mechanical layers (free items; w line width, h text height)
Top Overlay:
  drawing of 906 lines, arcs and shapes, not listed
  text "Smart Switch" at 2415,4265.83 h60
  text "VER1.1" at 2415.06,4215.83 h60
  text "@Kyuubi" at 2415,4156.71 h60

## Text inside footprints (layer, text, board x,y; h text height)
C1: Top Overlay "+" at 1930,4883 h30
C2: Top Overlay "+" at 2475,4913 h30
IC1: Mechanical 13 "ANTENNA" at 3497.03,5114.76 h30